# Altium PCB evalPCB.PcbDoc
Units mil, origin at the board's own origin, x right, y up, seen from the top; angles counter-clockwise.
Board outline 1574.8 x 1574.8 mil, 4 copper layers (Top Layer, GND, Layer 2, Bottom Layer), stack 23.756 mil thick; 12 components, 9 nets, 59 pads, 3 vias.
Unrouted connection lines stored in the file: 6.
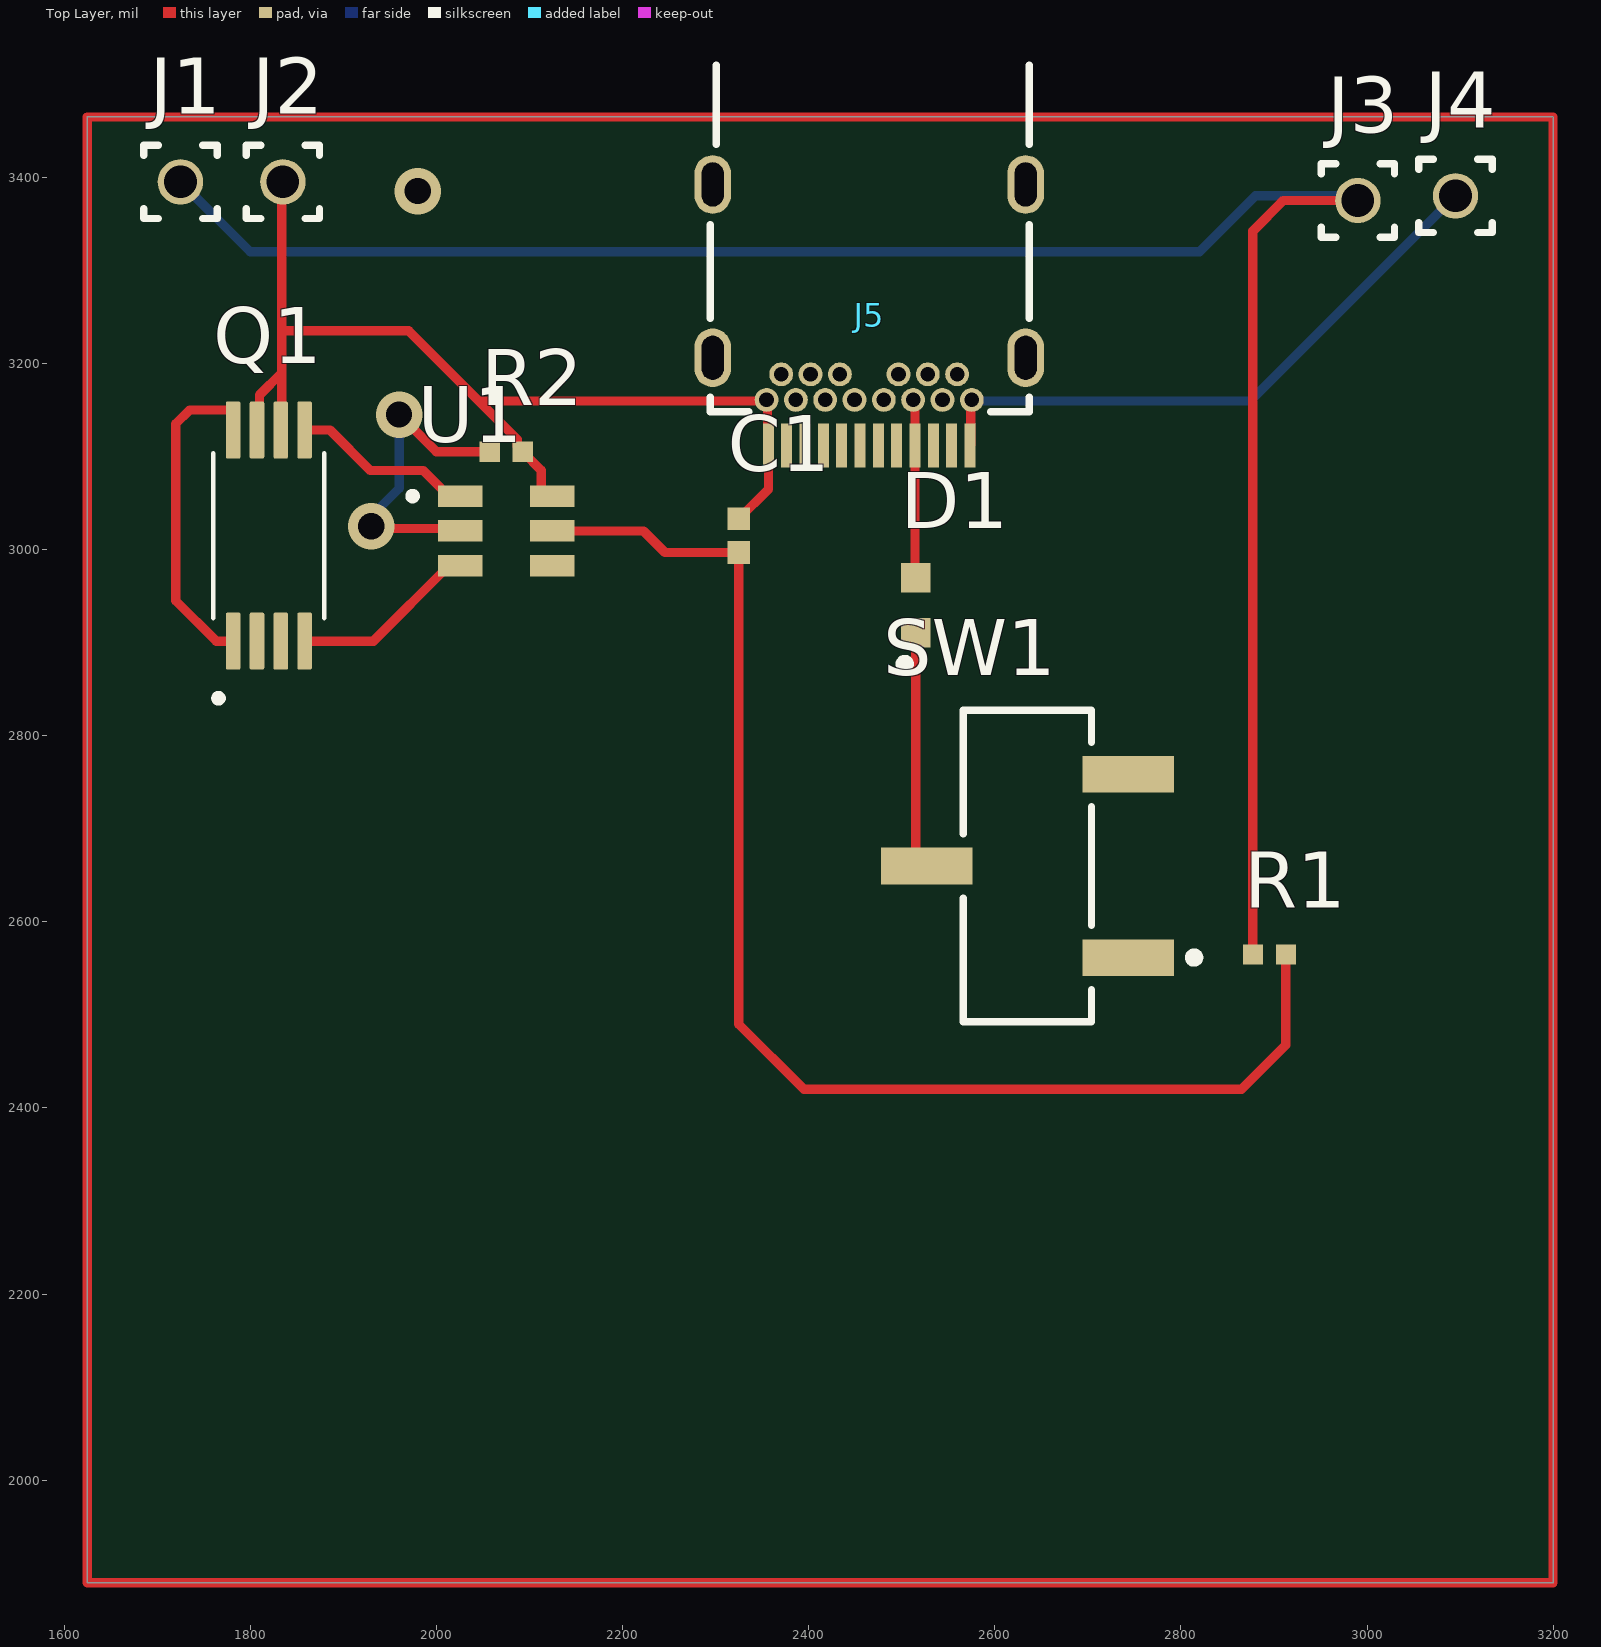
[diagram p0: Top Layer view]
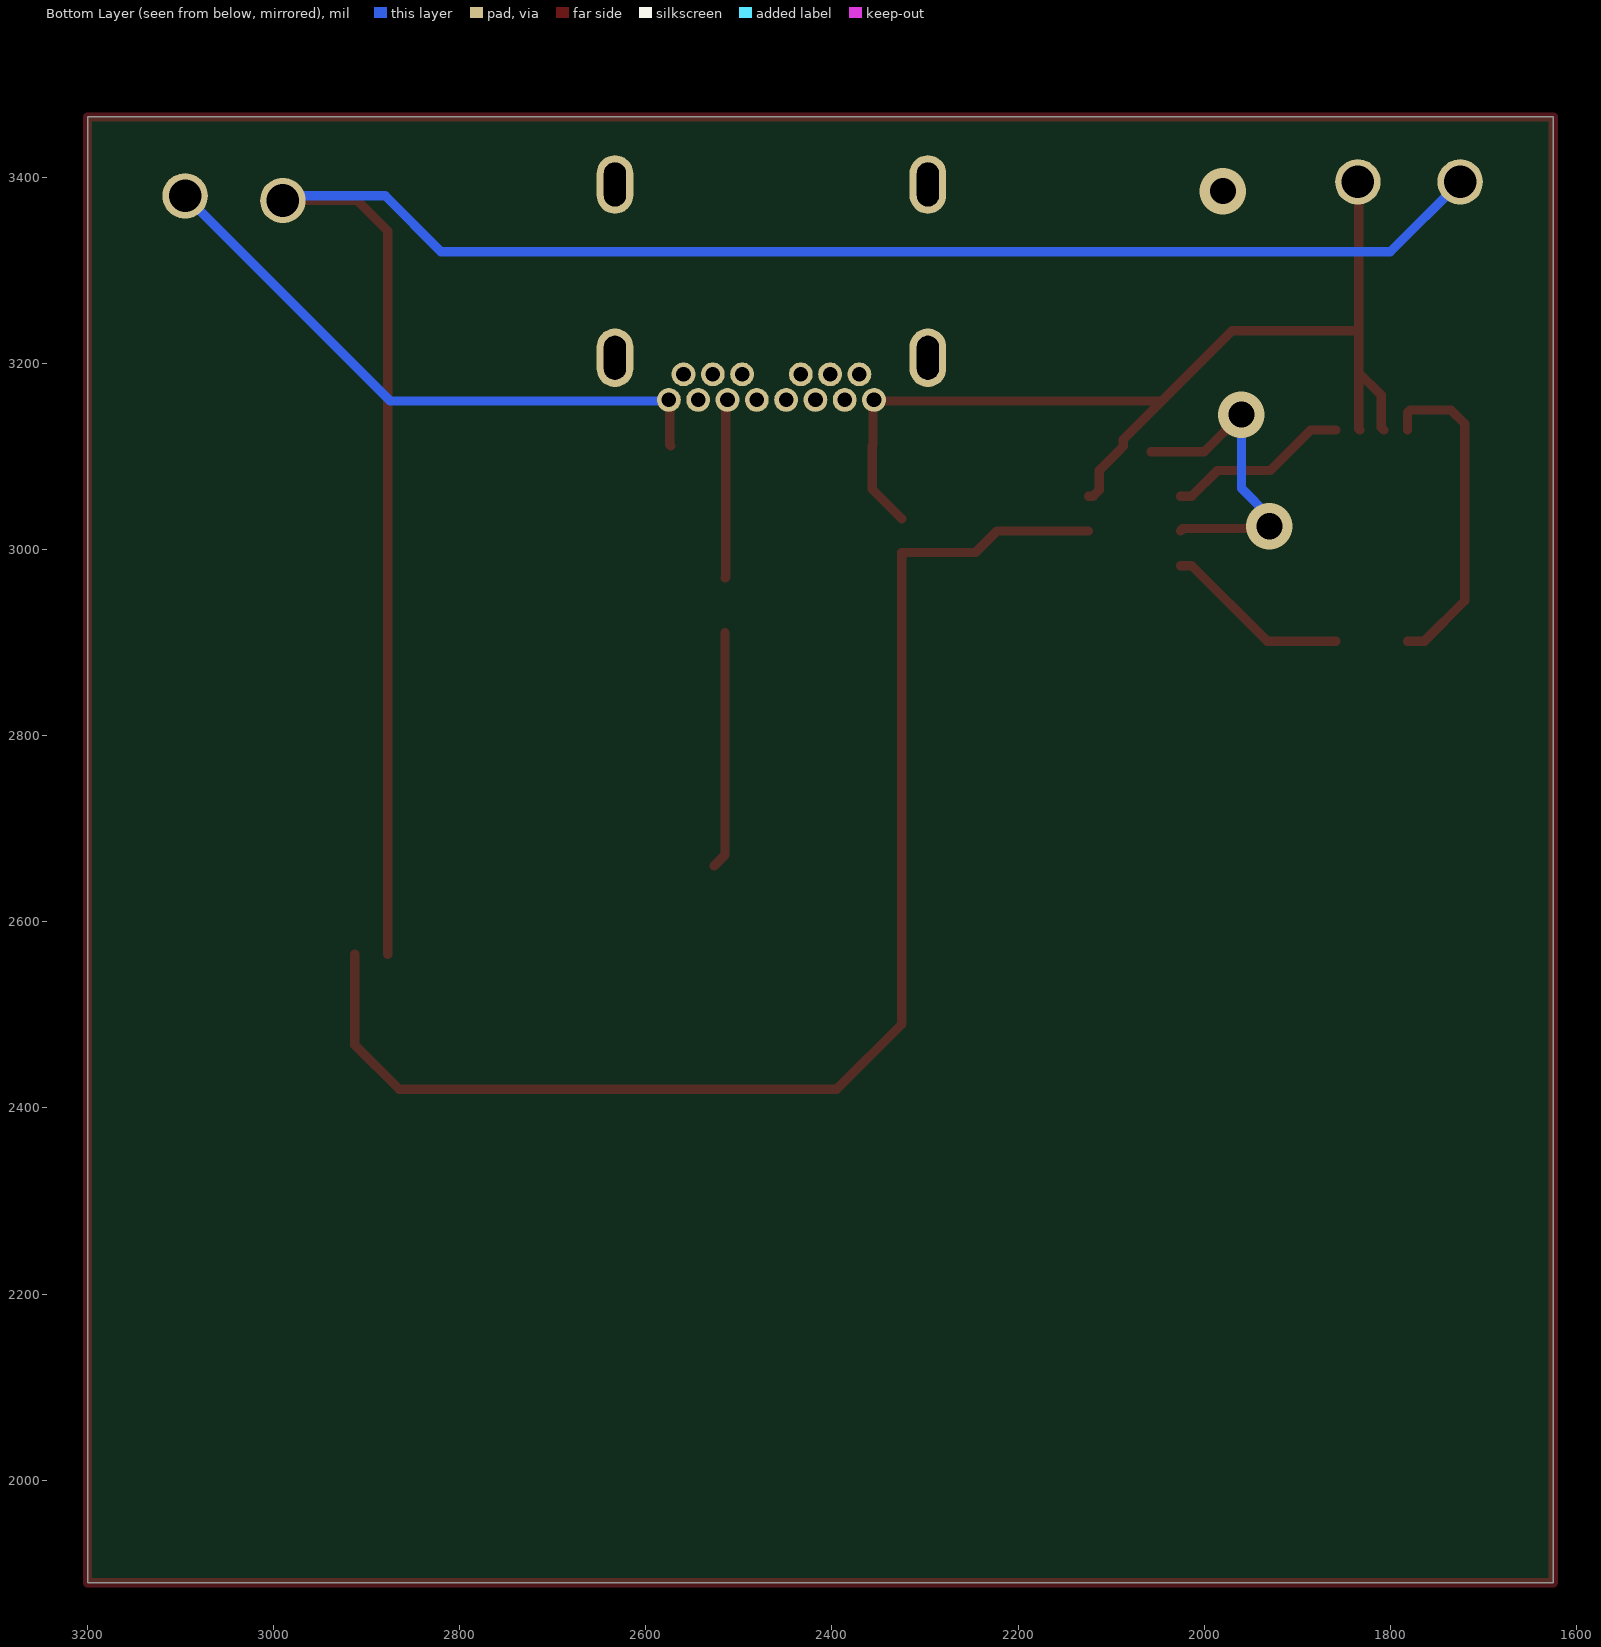
[diagram p1: Bottom Layer view, seen from below]
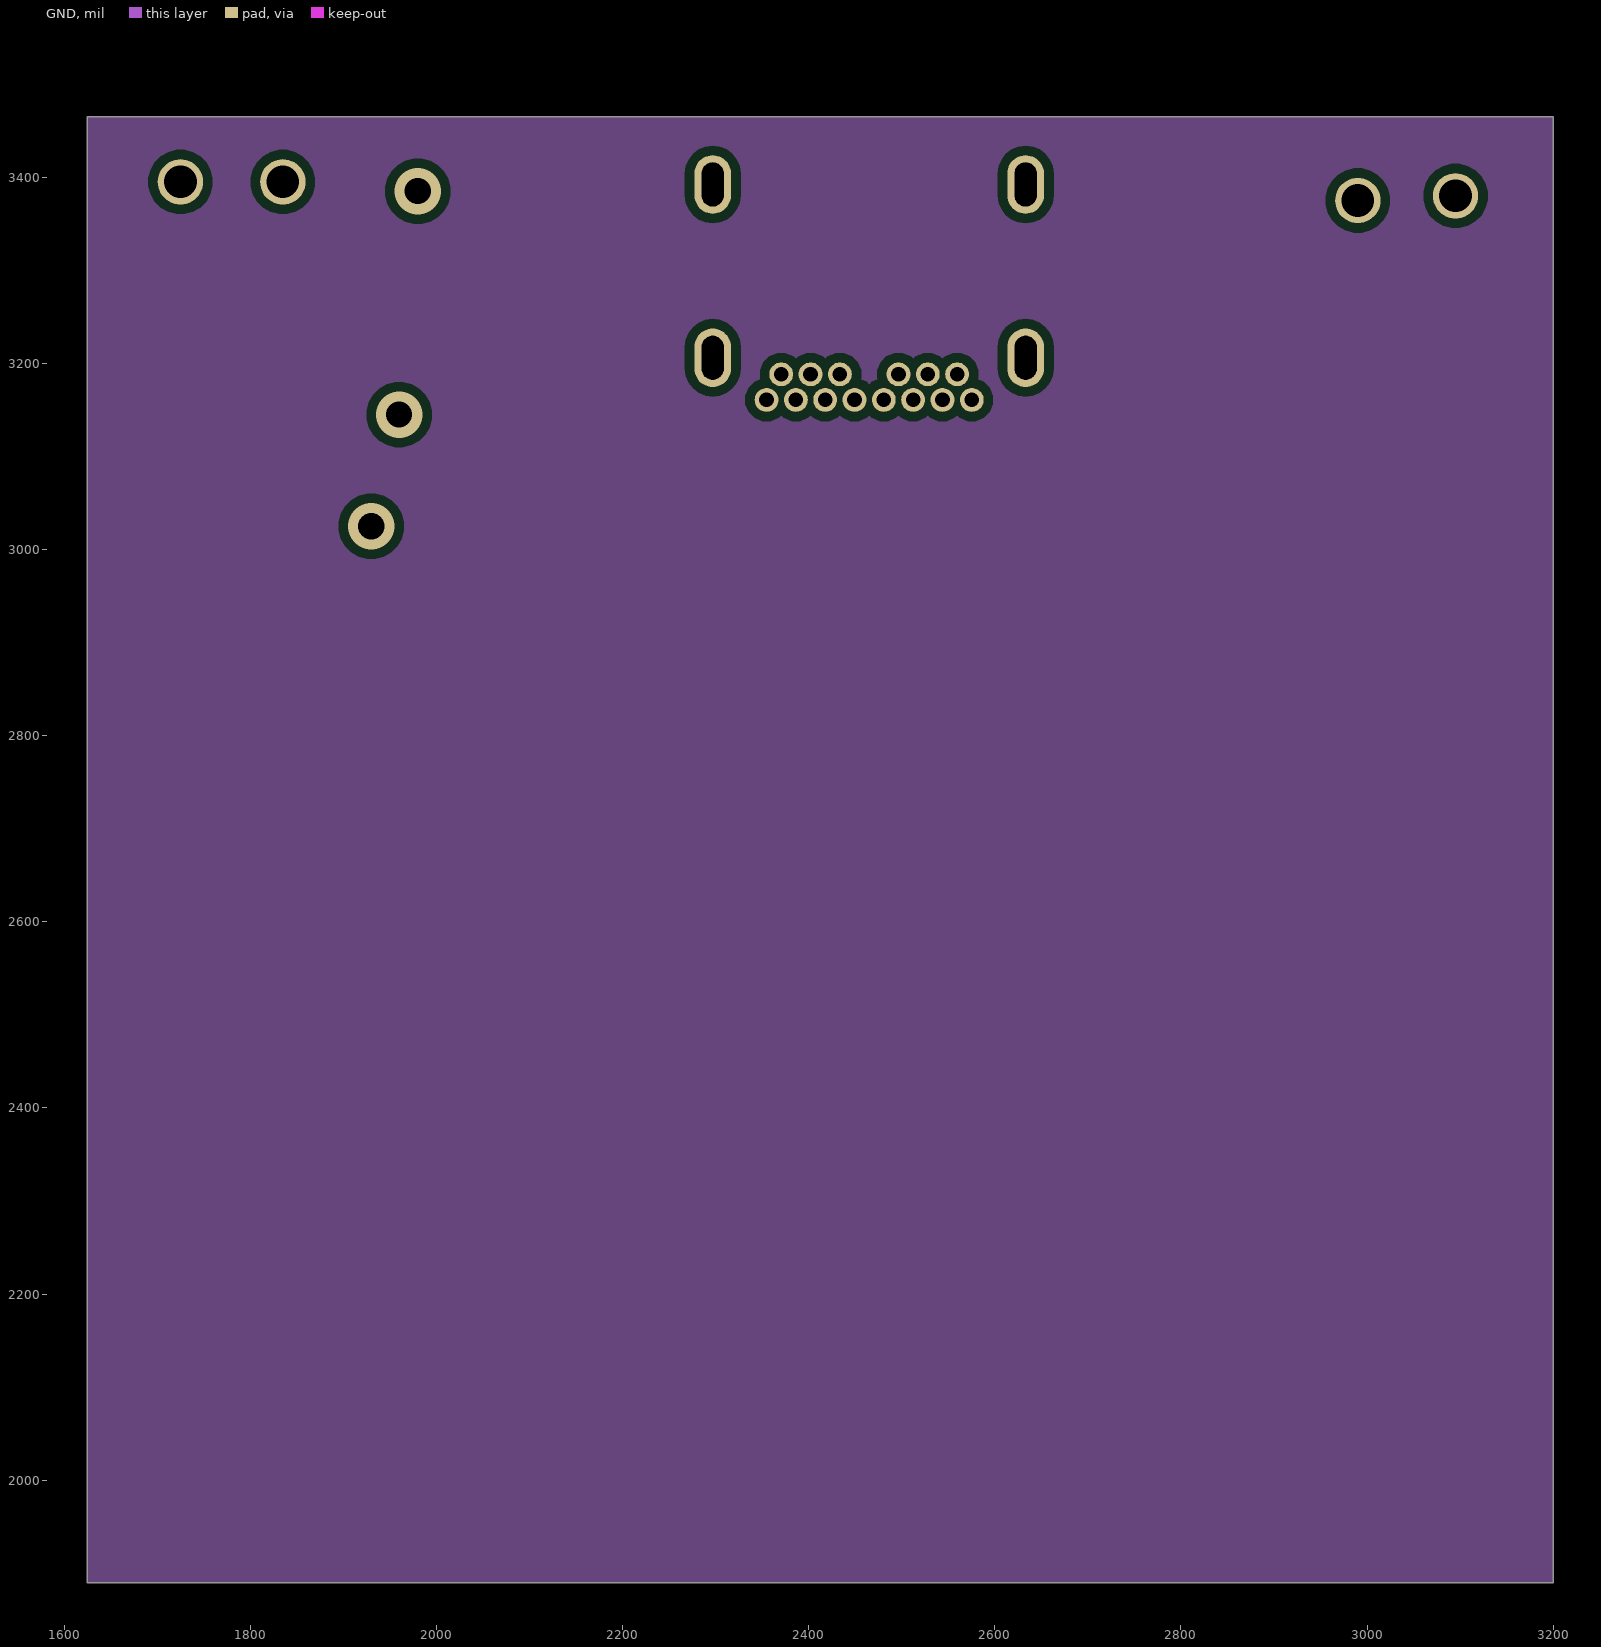
[diagram p2: GND]
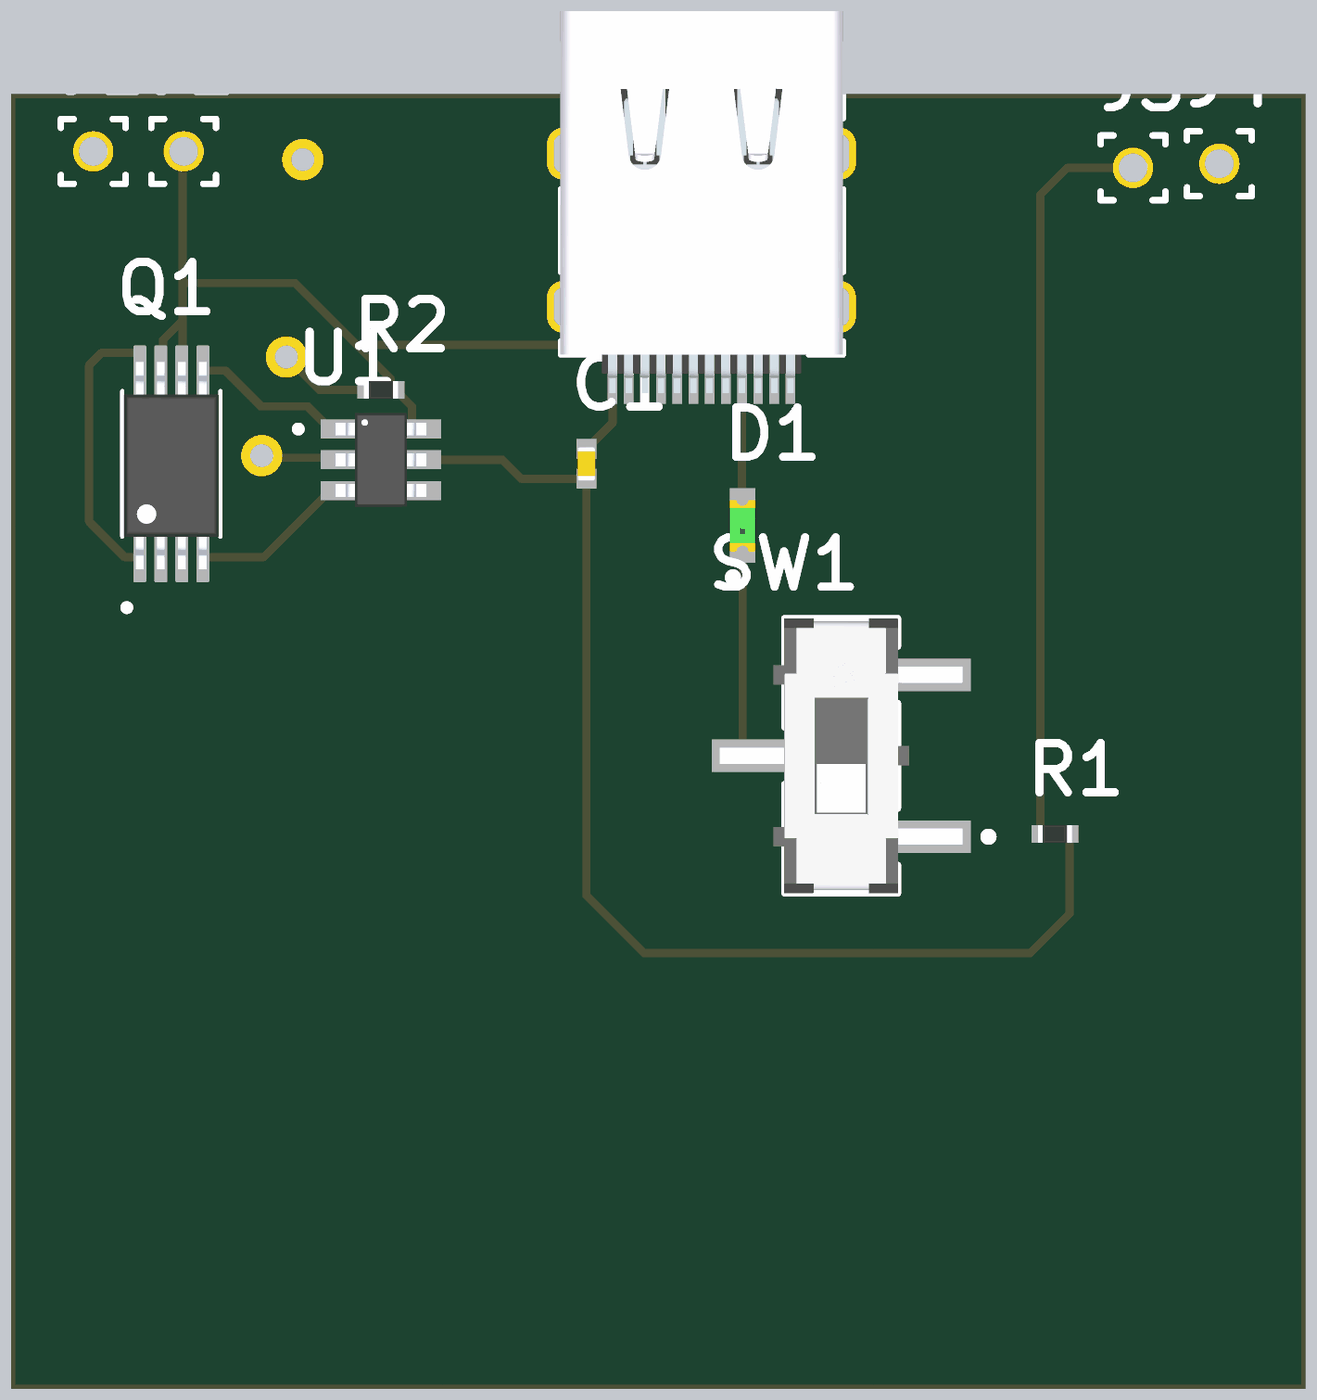
[diagram p3: 3D render of the assembled board from above, using the file's embedded part models]

## Layer stack, top to bottom
Top Solder: solder mask 0.4, Solder Resist, Dk 3.5
Top Layer: signal copper 1.4
Dielectric 2: prepreg 2.8, PP-006, Dk 4.1
GND: signal copper 1.378
Dielectric 1: dielectric 12.6, FR-4, Dk 4.8
Layer 2: signal copper 1.378
Dielectric 3: prepreg 2.8, PP-006, Dk 4.1
Bottom Layer: signal copper 1.4
Bottom Solder: solder mask 0.4, Solder Resist, Dk 3.5

## Board outline
1625,1890 1625,3464.8 3199.8,3464.8 3199.8,1890

## Design rules (kind name [scope] priority, off if disabled: settings)
Clearance [All] p1: gap=10 ignorepadtopadclearanceinfootprint=FALSE
PolygonConnect [All] p1: connectstyle=Relief reliefconductorwidth=10 reliefentries=4 polygonreliefangle="90 Angle" airgapwidth=10
RoutingVias [All] p1: holewidth=28 width=50 viastyle="Through Hole" minholewidth=28 minwidth=50 maxholewidth=28 maxwidth=50
SolderMaskExpansion [All] p1: expansion=0 istentingtop=FALSE
SupplyNets "Schematic Supply Nets_1" [InNet('VBUS')] p1: voltage=0.000
SupplyNets "Schematic Supply Nets" [InNet('GND')] p2: voltage=0.000
Width [All] p1: maxlimit=10 minlimit=10 preferedwidth=10
30 further rules are at their usual default settings.

## Components (designator, comment, footprint, x,y, rotation, side; value= is the part's Value field where it differs from the comment)
C1 "0,1uF" SMD-1005-CAP 2325,3015 r90 top
D1 "LED-RED" SMD-1608-LED 2515,2940 r90 top
J1 "BAT+" HEADER 1725,3395 r0 top
J2 "BAT-" HEADER 1835,3395 r0 top
J3 "Charge+" HEADER 2990,3375 r0 top
J4 "Charge-" HEADER 3095,3380 r0 top
J5 "USB-C" USB-C 2465,3345 r180 top
Q1 "FS8205A" FS8205A 1820,3015 r90 top
R1 "470Ω" SMD-1005-RES 2895,2565 r180 top
R2 "2KΩ" SMD-1005-RES 2075,3105 r0 top
SW1 "SWITCH" SMD-SWITCH 2635,2660 r90 top
U1 "DW01A" DW01A 2075,3020 r0 top

## Footprints (in the part's own frame and the unit in brackets; to place one, negate y for a bottom-side part, rotate by r counter-clockwise, add the part's x,y. Pads: shape width x height; smd on the part's side, far side on the other; paste and mask are expansions set on the pad)
DW01A [mm]
  rect 1.21x0.59 smd: 1(-1.255,0.95) 2(-1.255,0) 3(-1.255,-0.95) 4(1.255,-0.95) 5(1.255,0) 6(1.255,0.95)
  silkscreen extent -2.65,0.85 -2.46,1.05, body extent -1.4,-1.45 1.4,1.45, height 1.45
FS8205A [mm]
  rrect25% 1.56x0.4 smd: 1(-2.88,0.975) 2(-2.88,0.325) 3(-2.88,-0.325) 4(-2.88,-0.975) 5(2.88,-0.975) 6(2.88,-0.325) 7(2.88,0.325) 8(2.88,0.975)
  silkscreen extent -4.54,-1.52 2.25,1.52, body extent -3.25,-1.47 3.15,1.47, height 1.2
HEADER [mm]
  round 1.24 hole 0.89: 01(0,0)
  silkscreen extent -1,-1 1,1
SMD-1005-CAP [mm] "Chip Capacitor, 2-Leads, Body 1,00x0,50mm, IPC Medium Density"
  rect 0.62x0.62 smd: 1(-0.46,0) 2(0.46,0)
  body extent -0.53,-0.28 0.53,0.28, height 0.55
SMD-1005-RES [mm] "Chip Resistor, 2-Leads, Body 1,00x0,50mm, IPC Medium Density"
  rect 0.55x0.55 smd: 1(-0.45,0) 2(0.45,0)
  body extent -0.53,-0.28 0.53,0.28, height 0.55
SMD-1608-LED [mm]
  rect 0.8x0.8 smd paste+0 mask+0: 1(-0.75,0) 2(0.75,0)
  silkscreen extent -1.72,0.17 -1.48,0.42, body extent -1.25,-0.55 1.25,0.55, height 0.25
SMD-SWITCH [mm]
  rect 1x2.5 smd paste+0 mask+0: 1(-2.5,-2.75) 2(0,2.75) 3(2.5,-2.75)
  silkscreen extent -4.25,-4.68 4.25,1.75, body extent -4.35,-4.1 4.35,4.1, height 0.25
USB-C [mm] "USB 3.1 Type C Receptacle Horizontal THR"
  rect 0.3x1.2 smd: A1(-2.75,5.93) A2(-2.25,5.93) A3(-1.75,5.93) A4(-1.25,5.93) A5(-0.75,5.93) A6(-0.25,5.93) A7(0.25,5.93) A8(0.75,5.93) A9(1.25,5.93) A10(1.75,5.93) A11(2.25,5.93) A12(2.75,5.93)
  round 0.65 hole 0.4: B1(2.8,4.68) B2(2.4,3.98) B3(1.6,3.98) B4(1.2,4.68) B5(0.8,3.98) B6(0.4,4.68) B7(-0.4,4.68) B8(-0.8,3.98) B9(-1.2,4.68) B10(-1.6,3.98) B11(-2.4,3.98) B12(-2.8,4.68) Shell(-2,4.68) Shell(2,4.68)
  oval 1x1.6 hole 0.6 slot 1.2 at 90 deg: GND(-4.27,3.53) GND(-4.27,-1.2) GND(4.27,3.53) GND(4.27,-1.2)
  silkscreen extent -4.37,-4.45 4.34,5, body extent -4.37,-5.6 4.37,6.19, height 3.05

## Part data
C1: library part CAPACITOR
D1: "LED GREEN CLEAR CHIP SMD LTST-C190GKT", Case Code (Imperial)=0603, Case Code (Metric)=1608, Color=Green, Forward Current=30mA, Forward Voltage=2.1V, Lens Color=Colorless, Max Operating Temperature=85°C, Min Operating Temperature=-55°C, Package Quantity=1, Power Dissipation=100mW, Reverse Voltage=5V, Test Current=10mA, Voltage=2V, Case/Package=0603, Depth=0.8mm, Dominant Wavelength=569nm, Height=0.8mm, Illumination Color=Green, Lead Free="Lead Free", Length=1.6mm, Lens Style=Clear, Lens Transparency=Clear, Luminous Intensity=6mcd, Mount="Surface Mount", Number of Elements=1, Number of LEDs=1, Number of Pins=2, Packaging="Tape and Reel", Power Rating=100mW, Radiation Hardening=No, Viewing Angle=130°, Wavelength=565nm, Width=0.8mm
J1 J2 J3 J4: library part HEADER, "Connector Header Through Hole 1 position", Package=None, Check_prices=https://www.snapeda.com/parts/MTMM-101-05-G-S-225/Samtec/view-part/?ref=eda, MF=Samtec, MP=MTMM-101-05-G-S-225, SnapEDA_Link=https://www.snapeda.com/parts/MTMM-101-05-G-S-225/Samtec/view-part/?ref=snap
J5: Contact Resistance=30mΩ, Current Rating=5A, Insulation Resistance=1GΩ, Max Operating Temperature=105°C, Min Operating Temperature=-40°C, Voltage Rating=20V, Connector Type=USB, Contact Material="Gold, Nickel", Gender=Receptacle, Height=3.21mm, Mount="Surface Mount, Through Hole", NexarPartId=68112675, Number of Contacts=24, Number of Pins=24, Orientation=Horizontal, Packaging="Tape and Reel", Pin Length=1.9mm, RoHS=Compliant, USB Standard="USB 3.1"
Q1: "N/A", Package=Package, Availability="Not in stock", Check_prices=https://www.snapeda.com/parts/FS8205A/Fortune+Semiconductor/view-part/?ref=eda, MF="Fortune Semiconductor", MP=FS8205A, Price=None, SnapEDA_Link=https://www.snapeda.com/parts/FS8205A/Fortune+Semiconductor/view-part/?ref=snap
R1 R2: library part RESISTOR
SW1: "SWITCH SLIDE SPDT 300MA 6V JS102011SCQN", Actuator Color=Black, Case/Package=SMD/SMT, Contact Resistance=70mR, Current Rating=300mA, Max Operating Temperature=85°C, Max Voltage Rating (DC)=30V, Min Operating Temperature=-40°C, Package Quantity=4000, Voltage Rating (DC)=6V, Actuator Length=2mm, Actuator Material=Nylon, Actuator Type=Standard, Contact Material="Copper Alloy", Contact Plating=Silver, Depth=7.5mm, Electrical Life=5000Cycles, Housing Material=Nylon, Length=8.5mm, Max Current Rating=300mA, Mount="Surface Mount", Orientation=Straight, Packaging="Tape and Reel", Radiation Hardening=No, RoHS Compliant=Yes, Series=JS, Switch Function=On-On, Switch Travel=2mm, Termination="Gull Wing", Throw Configuration=SPDT
U1: "One Cell Lithium-ion/Polymer Battery Protection IC", Package="SOT-23-6 Fortune Semiconductor", Check_prices=https://www.snapeda.com/parts/DW01A/Fortune+Semiconductor/view-part/?ref=eda, MF="Fortune Semiconductor", MP=DW01A, SnapEDA_Link=https://www.snapeda.com/parts/DW01A/Fortune+Semiconductor/view-part/?ref=snap

## Via types
v1: diameter 50, hole 28, Top Layer to Bottom Layer, 3 vias

## Nets (pads, with @x,y where several pads share a name; then routed paths per layer and width w, separated by ;. In a path a pad name is that pad's centre, name@x,y a point inside that pad or via, vN(x,y) a via of type N, cw(c..) or ccw(c..) an arc to the next point about the centre after c; other vN are vias at no path point)
GND: C1.2 J2.01 J4.01 J5.A1 J5.A12 J5.B1 J5.B12 Q1.2 Q1.3 Q1.6 Q1.7 R2.2 U1.6 | length 1838.1
  Top Layer w10: Q1.7 1809.92,3131.1 1809.92,3166.02 1833.9,3190 ; Q1.6 1833.9,3129.49 1833.9,3190 ; J2.01 1833.9,3393.9 1833.9,3235 ; U1.6 2119.3,3057.4 2112.69,3064.02 2112.69,3085.03 R2.2 2086.89,3110.83 2086.89,3118.26 2042.58,3162.58 ; C1.2 2356.73,3064.84 J5.A12 2355.83,3112.44 2355.83,3159.68 J5.B1 2353.54,3159.53 2045.62,3159.53 2042.58,3162.58 ; J5.A1 2574.17,3112.44 2574.17,3159.68 J5.B12 ; 1833.9,3190 1833.9,3235 ; 1833.9,3235 1970.15,3235 2042.58,3162.58
  Bottom Layer w10: J5.B12 2576.46,3159.53 2874.53,3159.53 J4.01
NetC1_1: C1.1 R1.1 U1.5 | length 1450.8
  Top Layer w10: U1.5 2222.56,3020 2245.67,2996.89 C1.1 2325,2490 2395,2420 2865,2420 2912.72,2467.72 R1.1
NetD1_1: D1.1 SW1.2 | length 255.3
  Top Layer w10: D1.1 2515,2671.73 SW1.2
NetJ1_01: J1.01 J3.01 R1.2 SW1.1 | length 2224.5
  Top Layer w10: R1.2 2877.28,3342.28 2910,3375 J3.01
  Bottom Layer w10: J1.01 1800,3320 2820,3320 2880,3380 J3.01@2990,3380
NetQ1_1: Q1.1 Q1.8 | length 357.3
  Top Layer w10: Q1.1 1763.39,2901.61 1720,2945 1720,3135 1735,3150 1778.74,3150 1781.61,3147.13 Q1.8
NetQ1_4: Q1.4 U1.3 | length 200.7
  Top Layer w10: Q1.4 1932.4,2901.61 2013.39,2982.6 U1.3
NetQ1_5: Q1.5 U1.1 | length 196.6
  Top Layer w10: Q1.5 1885.67,3128.39 1929.06,3085 1985.79,3085 2013.39,3057.4 U1.1
NetR2_1: R2.1 U1.2 | length 343.9
  Top Layer w10: v1(1930,3025) 1932.5,3022.5 2023.09,3022.5 U1.2 ; v1(1960,3145) 2000,3105 R2.1
  Bottom Layer w10: v1(1930,3025) 1930,3035.82 1960,3065.82 v1(1960,3145)
VBUS: D1.2 J5.A4 J5.A9 J5.B4 J5.B9 | length 192.4
  Top Layer w10: J5.B9 2514.21,3158.78 J5.A4 2514.21,2970.32 D1.2
pads on no net: J5.A2 J5.A3 J5.A5 J5.A6 J5.A7 J5.A8 J5.A10 J5.A11 J5.B2 J5.B3 J5.B5 J5.B6 J5.B7 J5.B8 J5.B10 J5.B11 J5.GND J5.Shell SW1.3 U1.4
copper on no net: | length 6299.2
  Top Layer w10: 1625,1890 3199.8,1890 3199.8,3464.8 1625,3464.8 1625,1890
  other v1: 1980,3385

## Polygon pours and split planes (outlines as drawn)
no net on GND "NONET_L-01_P-001" (solid, pour order 1): 1625,3465 1625,1890 3200,1890 3200,3465

## Text inside footprints (layer, text, board x,y; h text height)
J5: Bottom Assembly "PCB Edge" at 2539.8,3557.6 h24 r180